# EAGLE board R3-URC18-V1 (1) (EAGLE 8.6.0)
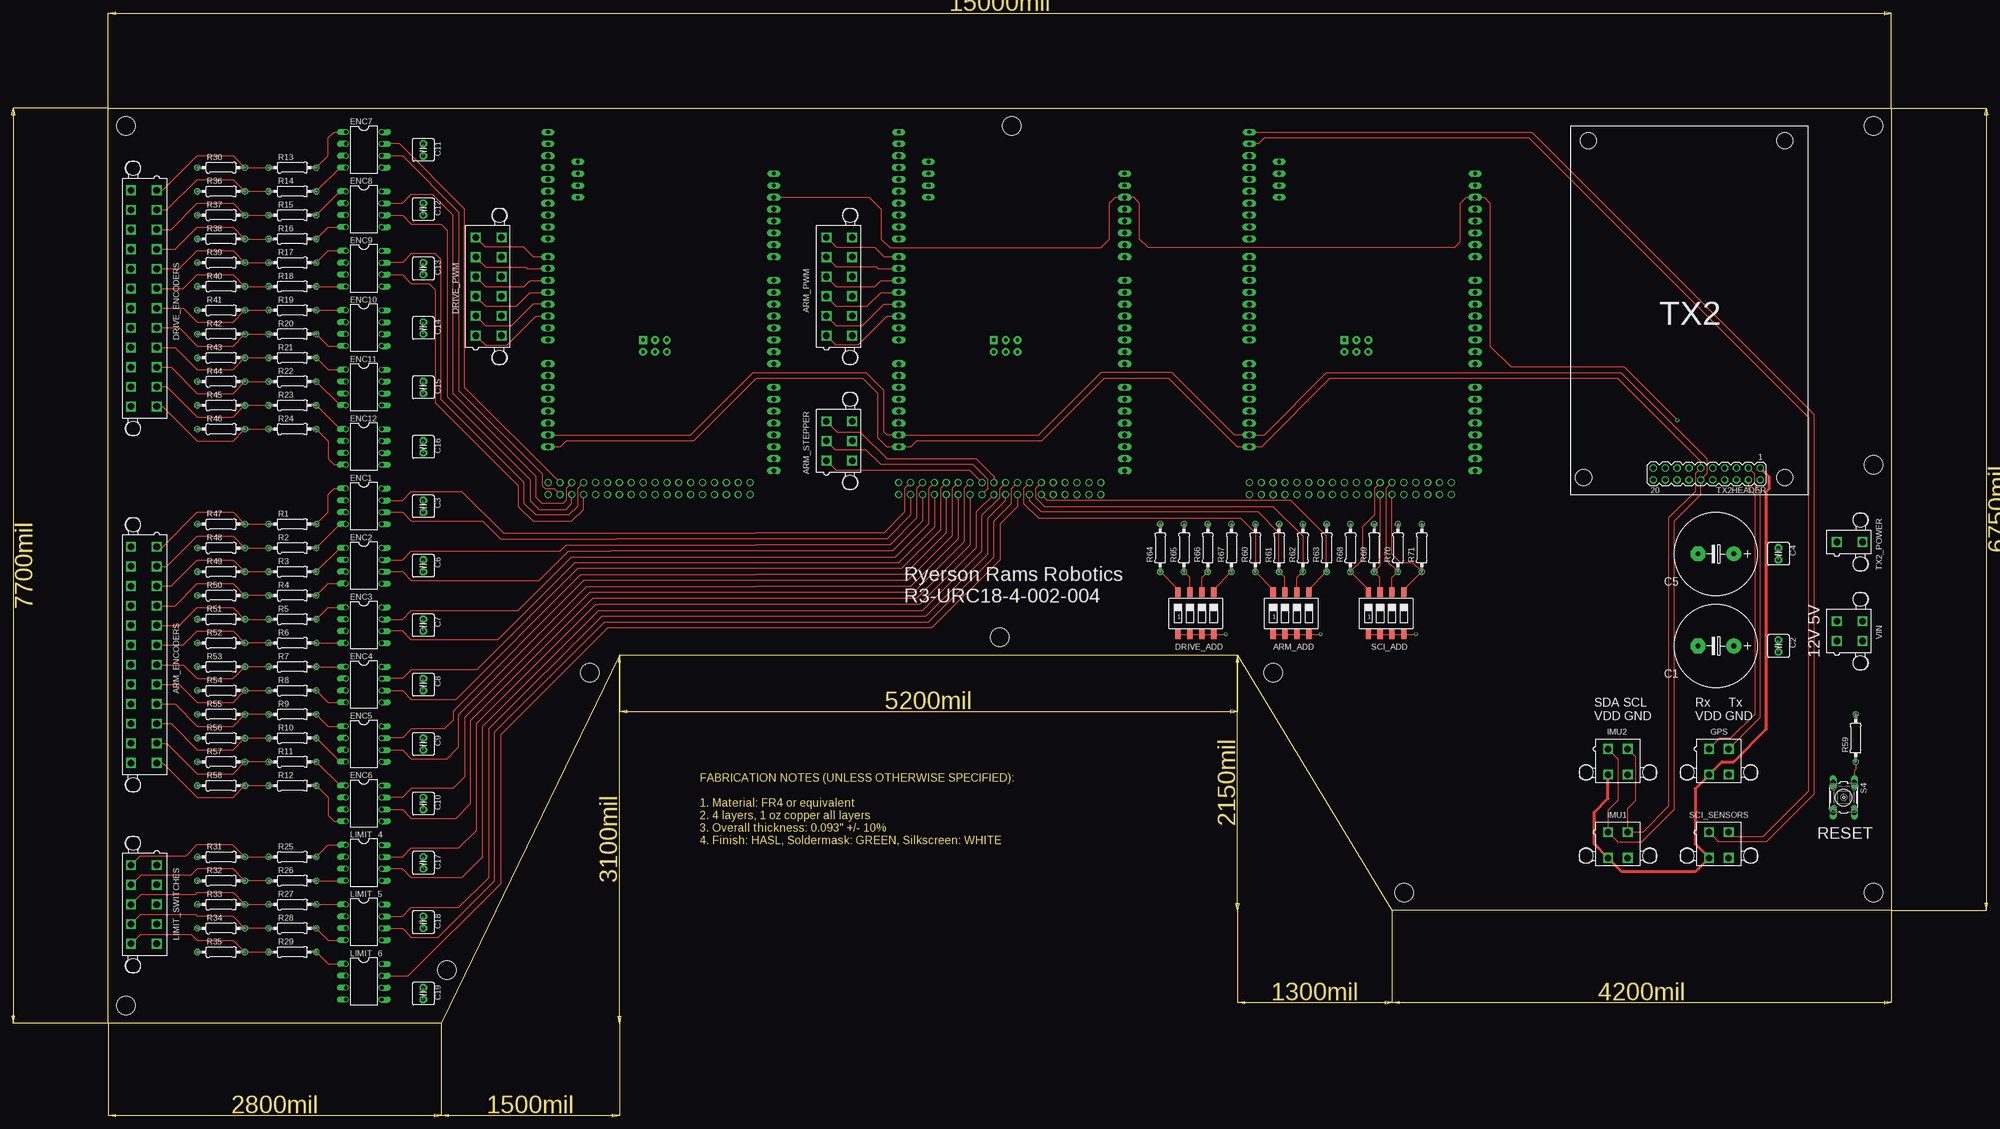
[diagram p0: board, top side]
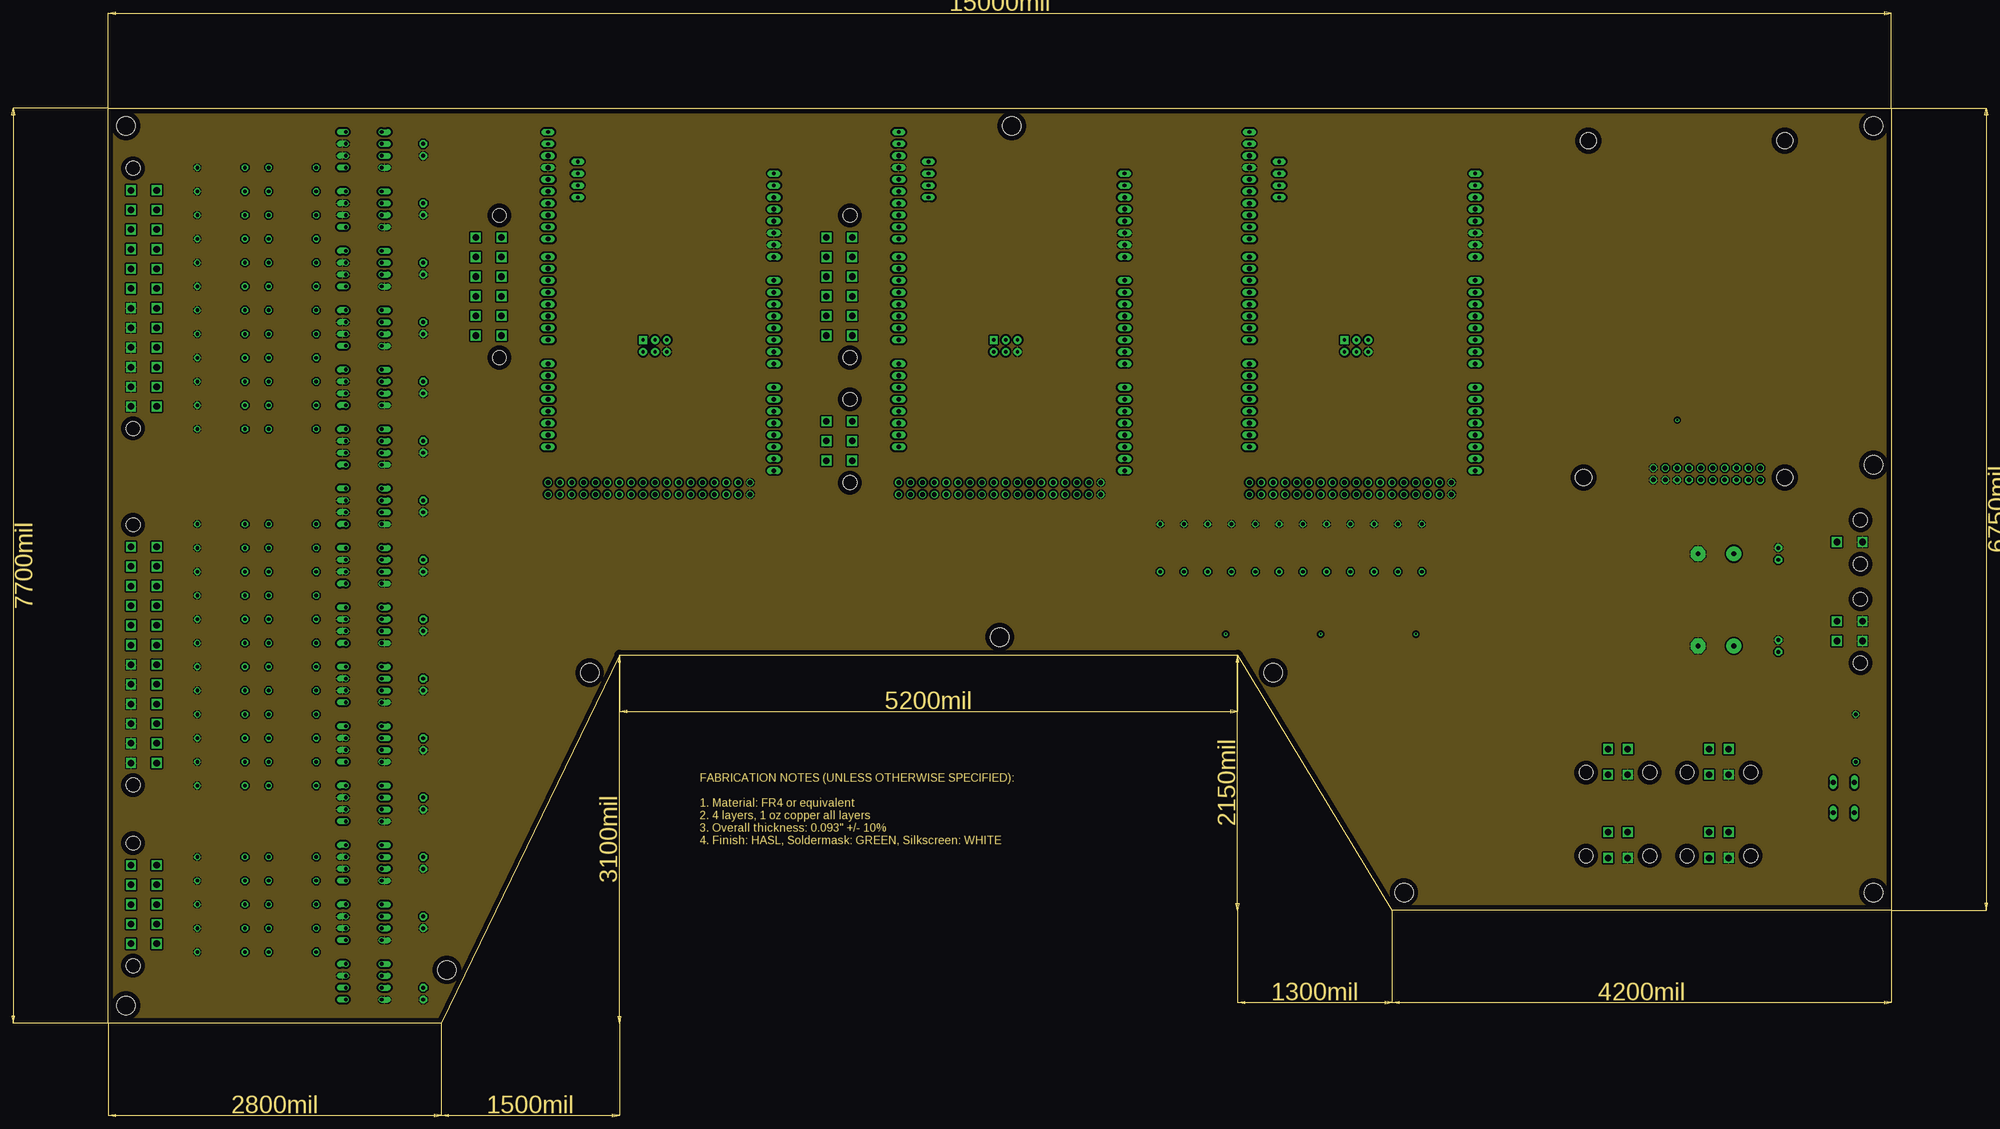
[diagram p1: board, inner layer $GND]
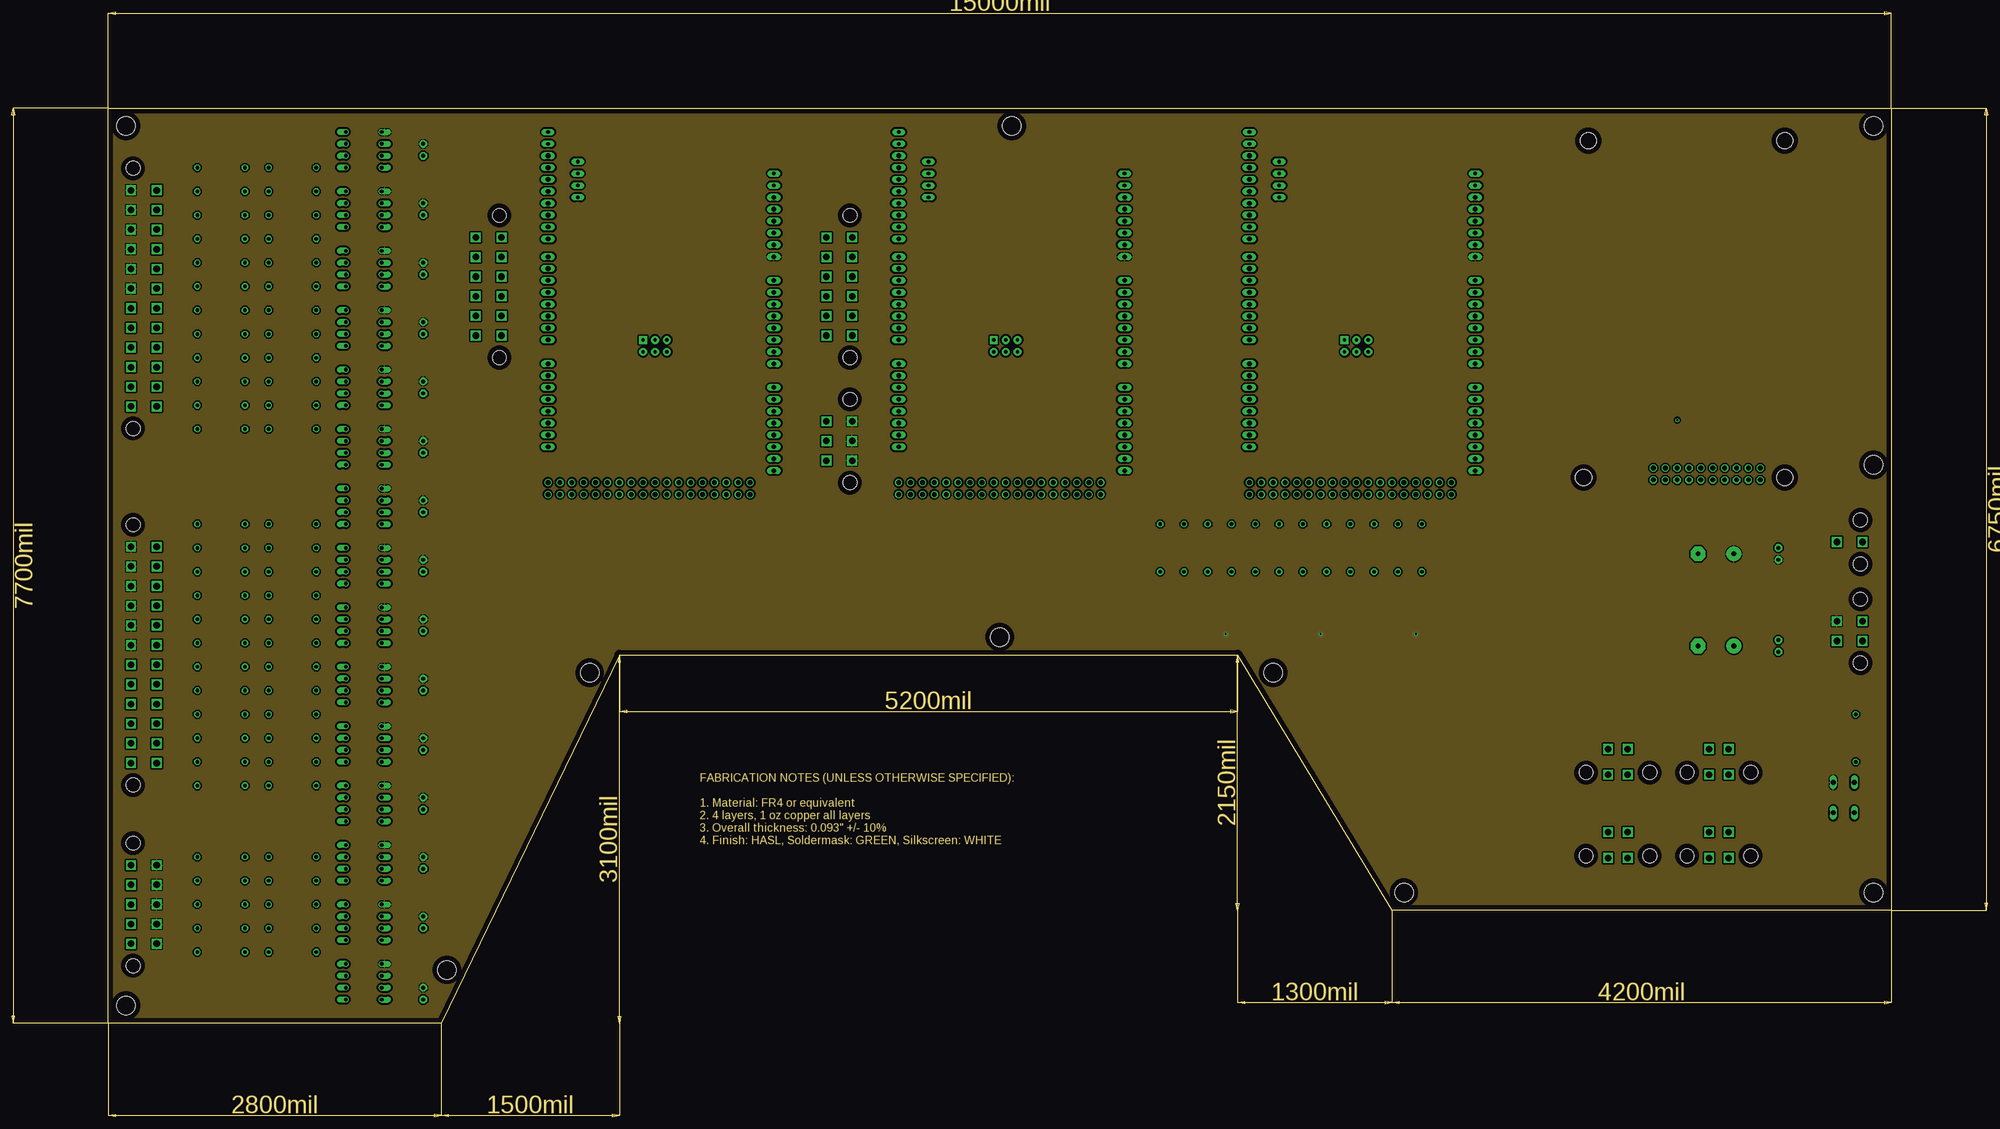
[diagram p2: board, inner layer $VCC]
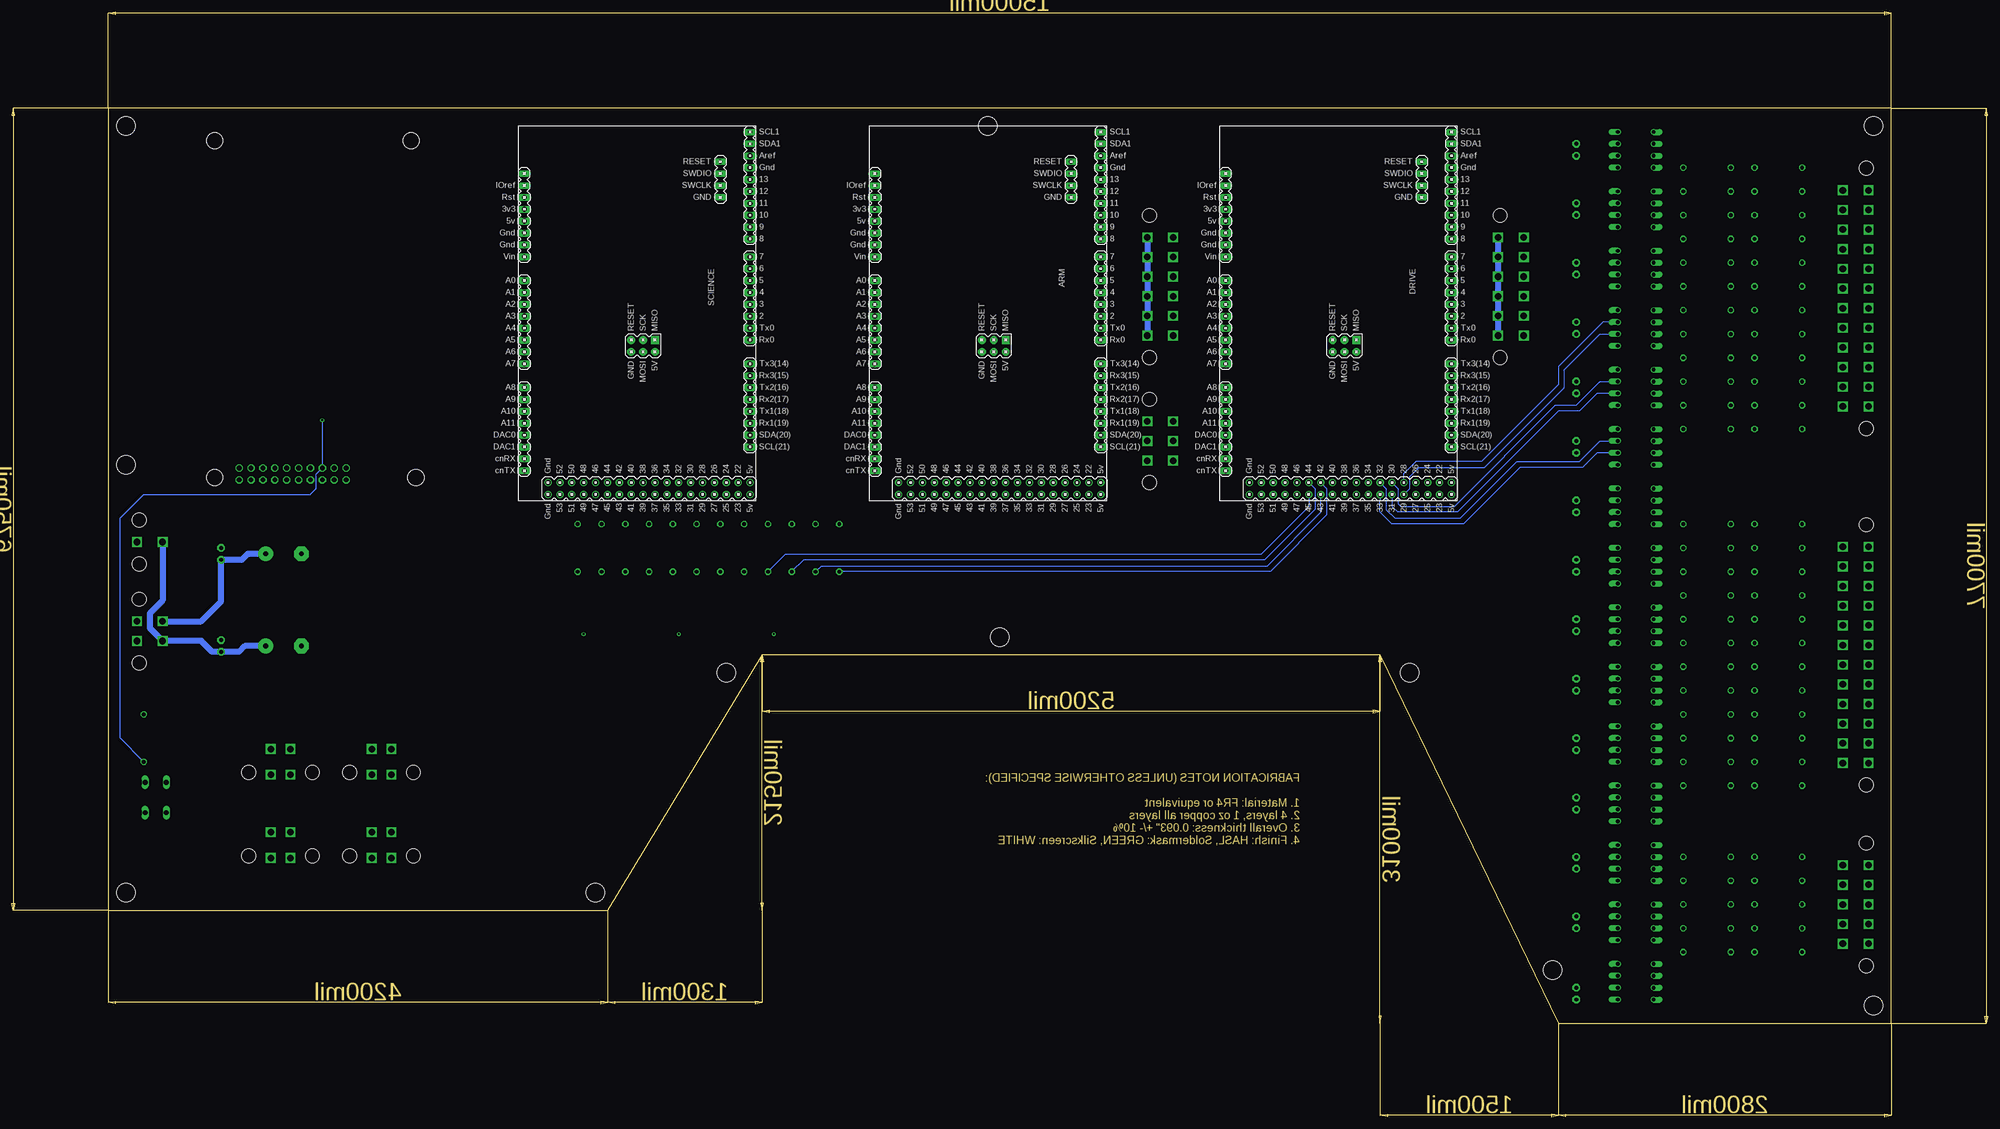
[diagram p3: board, bottom side, seen from below]

Size 381 x 195.58 mm. Coordinates in mm from the lower left corner, seen from the top.
Outline: 0,195.58 381,195.58 381,24.13 274.32,24.13 241.3,78.74 109.22,78.74 71.12,0 0,0 0,195.58
Copper layers (1+2*15+16): Top 0.035mm / dielectric 0.35mm / $GND 0.035mm / dielectric 1.6mm / $VCC 0.035mm / dielectric 0.35mm / Bottom 0.035mm
Design rules "default *": minimum track width 8mil, minimum drill 0.35mm, track to track 8mil, track to pad 8mil, pad to pad 8mil, via to via 8mil, smd to smd 8mil, copper to edge 40mil, drill to drill 8mil, minimum pad ring 10mil, minimum via ring 8mil, stop-mask expansion 4mil, vias tented up to drill 0mil, thermal gap 10mil
Holes 3.5 mm at 316.26,188.64 358.26,188.64 358.26,116.64 315.26,116.64
Holes 4 mm at 248.92,74.93 190.5,82.55 102.87,74.93 72.39,11.43 3.81,191.77 193.04,191.77 377.19,191.77 377.19,27.94 276.86,27.94 377.19,119.38 3.81,3.81

## Footprints (pad centres in the part's own frame; a part is rotated, then mirrored left to right if it is on the bottom)
DUE(BOTTOMONLY) = drill 1 long: 2 -16.51,30.48; 3 -19.05,30.48; 3V3 -39.37,-17.78; 4 -21.59,30.48; 5 -24.13,30.48; 5V -36.83,-17.78; 6 -26.67,30.48; 7 -29.21,30.48; 8 -33.02,30.48; 9 -35.56,30.48; 10 -38.1,30.48; 11 -40.64,30.48; 12 -43.18,30.48; 13 -45.72,30.48; A0 -24.13,-17.78; A1 -21.59,-17.78; A2 -19.05,-17.78; A3 -16.51,-17.78; A4 -13.97,-17.78; A5 -11.43,-17.78; A6 -8.89,-17.78; A7 -6.35,-17.78; A8 -1.27,-17.78; A9 1.27,-17.78; A10 3.81,-17.78; A11 6.35,-17.78; AREF -50.8,30.48; AREF1 -50.8,30.48; CANRX 13.97,-17.78; CANTX 16.51,-17.78; DAC0 8.89,-17.78; DAC1 11.43,-17.78; GND1 -48.26,30.48; GND_1 -34.29,-17.78; GND_2 -31.75,-17.78; RESET -41.91,-17.78; RX0 -11.43,30.48; RX1 6.35,30.48; RX2 1.27,30.48; RX3 -3.81,30.48; SCL 11.43,30.48; SDA 8.89,30.48; TX0 -13.97,30.48; TX1 3.81,30.48; TX2 -1.27,30.48; TX3 -6.35,30.48; VIN -29.21,-17.78 | drill 1: 5V_A 19.05,30.48; 5V_B 21.59,30.48; 22 19.05,27.94; 23 21.59,27.94; 24 19.05,25.4; 25 21.59,25.4; 26 19.05,22.86; 27 21.59,22.86; 28 19.05,20.32; 29 21.59,20.32; 30 19.05,17.78; 31 21.59,17.78; 32 19.05,15.24; 33 21.59,15.24; 34 19.05,12.7; 35 21.59,12.7; 36 19.05,10.16; 37 21.59,10.16; 38 19.05,7.62; 39 21.59,7.62; 40 19.05,5.08; 41 21.59,5.08; 42 19.05,2.54; 43 21.59,2.54; 44 19.05,0; 45 21.59,0; 46 19.05,-2.54; 47 21.59,-2.54; 48 19.05,-5.08; 49 21.59,-5.08; 50 19.05,-7.62; 51 21.59,-7.62; 52 19.05,-10.16; 53 21.59,-10.16; GND_A 19.05,-12.7; GND_B 21.59,-12.7 | drill 0.7 pad 1.676: 5V_ICSP -8.89,5.08; GND_ICSP -8.89,10.16; MOSI_ICSP -8.89,7.62; RESET_ICSP -11.43,5.08; SCK_ICSP -11.43,7.62 | drill 0.8 pad 1.422 long: GND_DEBUG -41.91,24.13; IOREF -44.45,-17.78; NC -46.99,-17.78; RESET_DEBUG -49.53,24.13; SCL1 -55.88,30.48; SDA1 -53.34,30.48; SWCLK_DEBUG -44.45,24.13; SWDIO_DEBUG -46.99,24.13 | drill 0.7 pad 1.676 square: MISO_ICSP -11.43,10.16
SMS-004 = smd 1.092 x 2.007: 1 -3.81,-4.496; 2 -1.27,-4.496; 3 1.27,-4.496; 4 3.81,-4.496; 5 3.81,4.496; 6 1.27,4.496; 7 -1.27,4.496; 8 -3.81,4.496
5566-24 = drill 1.4 square: 1 23.1,-2.75; 2 18.9,-2.75; 3 14.7,-2.75; 4 10.5,-2.75; 5 6.3,-2.75; 6 2.1,-2.75; 7 -2.1,-2.75; 8 -6.3,-2.75; 9 -10.5,-2.75; 10 -14.7,-2.75; 11 -18.9,-2.75; 12 -23.1,-2.75; 13 23.1,2.75; 14 18.9,2.75; 15 14.7,2.75; 16 10.5,2.75; 17 6.3,2.75; 18 2.1,2.75; 19 -2.1,2.75; 20 -6.3,2.75; 21 -10.5,2.75; 22 -14.7,2.75; 23 -18.9,2.75; 24 -23.1,2.75 | hole 3: 27.8,2.29; -27.8,2.29
5566-12 = drill 1.4 square: 1 10.5,-2.75; 2 6.3,-2.75; 3 2.1,-2.75; 4 -2.1,-2.75; 5 -6.3,-2.75; 6 -10.5,-2.75; 7 10.5,2.75; 8 6.3,2.75; 9 2.1,2.75; 10 -2.1,2.75; 11 -6.3,2.75; 12 -10.5,2.75 | hole 3: 15.2,2.29; -15.2,2.29
5566-6 = drill 1.4 square: 1 4.2,-2.75; 2 0,-2.75; 3 -4.2,-2.75; 4 4.2,2.75; 5 0,2.75; 6 -4.2,2.75 | hole 3: 8.9,2.29; -8.9,2.29
E7,5-18 = drill 1.016 pad 3.15: + -3.81,0 | drill 1.016 pad 3.15 octagon: - 3.81,0
C2.5-5 = drill 0.813 pad 1.6 octagon: 1 -1.27,0; 2 1.27,0
DIL08 = drill 0.813 offset: 1 -3.81,-3.81; 2 -1.27,-3.81; 3 1.27,-3.81; 4 3.81,-3.81; 5 3.81,3.81; 6 1.27,3.81; 7 -1.27,3.81; 8 -3.81,3.81
5566-4 = drill 1.4 square: 1 2.1,-2.75; 2 -2.1,-2.75; 3 2.1,2.75; 4 -2.1,2.75 | hole 3: 6.8,2.29; -6.8,2.29
5566-10 = drill 1.4 square: 1 8.4,-2.75; 2 4.2,-2.75; 3 0,-2.75; 4 -4.2,-2.75; 5 -8.4,-2.75; 6 8.4,2.75; 7 4.2,2.75; 8 0,2.75; 9 -4.2,2.75; 10 -8.4,2.75 | hole 3: 13.1,2.29; -13.1,2.29
0207/10 = drill 0.813 octagon: 1 -5.08,0; 2 5.08,0
B3F-10XX = drill 1.016 long: 1 -3.251,2.261; 2 3.251,2.261; 3 -3.251,-2.261; 4 3.251,-2.261
5566-2 = drill 1.4 square: 1 0,-2.75; 2 0,2.75 | hole 3: 4.7,2.29; -4.7,2.29
MA10-2 = drill 1.016 octagon: 1 -11.43,-1.27; 2 -11.43,1.27; 3 -8.89,-1.27; 4 -8.89,1.27; 5 -6.35,-1.27; 6 -6.35,1.27; 7 -3.81,-1.27; 8 -3.81,1.27; 9 -1.27,-1.27; 10 -1.27,1.27; 11 1.27,-1.27; 12 1.27,1.27; 13 3.81,-1.27; 14 3.81,1.27; 15 6.35,-1.27; 16 6.35,1.27; 17 8.89,-1.27; 18 8.89,1.27; 19 11.43,-1.27; 20 11.43,1.27

## Placement (x,y rotation side)
ARM  [DUE(BOTTOMONLY)]  199.39,134.62 270 bottom
ARM_ADD  SWS004  [SMS-004]  252.73,87.63 0 top
ARM_ENCODERS  MOLEX  [5566-24]  7.62,78.74 90 top
ARM_PWM  MOLEX  [5566-12]  156.21,157.48 270 top
ARM_STEPPER  5566-6  [5566-6]  156.21,124.46 270 top
C1  220uF  [E7,5-18]  343.54,80.64 180 top
C2  100nF  [C2.5-5]  356.87,80.64 270 top
C3  100nF  [C2.5-5]  67.31,110.49 270 top
C4  100nF  [C2.5-5]  356.87,100.33 270 top
C5  220uF  [E7,5-18]  343.54,100.33 180 top
C6  100nF  [C2.5-5]  67.31,97.79 270 top
C7  100nF  [C2.5-5]  67.31,85.09 270 top
C8  100nF  [C2.5-5]  67.31,72.39 270 top
C9  100nF  [C2.5-5]  67.31,59.69 270 top
C10  100nF  [C2.5-5]  67.31,46.99 270 top
C11  100nF  [C2.5-5]  67.31,186.69 270 top
C12  100nF  [C2.5-5]  67.31,173.99 270 top
C13  100nF  [C2.5-5]  67.31,161.29 270 top
C14  100nF  [C2.5-5]  67.31,148.59 270 top
C15  100nF  [C2.5-5]  67.31,135.89 270 top
C16  100nF  [C2.5-5]  67.31,123.19 270 top
C17  100nF  [C2.5-5]  67.31,34.29 270 top
C18  100nF  [C2.5-5]  67.31,21.59 270 top
C19  100nF  [C2.5-5]  67.31,6.35 270 top
DRIVE  [DUE(BOTTOMONLY)]  124.46,134.62 270 bottom
DRIVE_ADD  SWS004  [SMS-004]  232.41,87.63 0 top
DRIVE_ENCODERS  MOLEX  [5566-24]  7.62,154.94 90 top
DRIVE_PWM  MOLEX  [5566-12]  81.28,157.48 270 top
ENC1  HCPL2530  [DIL08]  54.61,110.49 270 top
ENC2  HCPL2530  [DIL08]  54.61,97.79 270 top
ENC3  HCPL2530  [DIL08]  54.61,85.09 270 top
ENC4  HCPL2530  [DIL08]  54.61,72.39 270 top
ENC5  HCPL2530  [DIL08]  54.61,59.69 270 top
ENC6  HCPL2530  [DIL08]  54.61,46.99 270 top
ENC7  HCPL2530  [DIL08]  54.61,186.69 270 top
ENC8  HCPL2530  [DIL08]  54.61,173.99 270 top
ENC9  HCPL2530  [DIL08]  54.61,161.29 270 top
ENC10  HCPL2530  [DIL08]  54.61,148.59 270 top
ENC11  HCPL2530  [DIL08]  54.61,135.89 270 top
ENC12  HCPL2530  [DIL08]  54.61,123.19 270 top
GPS  MOLEX  [5566-4]  344.17,55.88 180 top
IMU1  MOLEX  [5566-4]  322.58,38.1 180 top
IMU2  MOLEX  [5566-4]  322.58,55.88 180 top
LIMIT_4  HCPL2530  [DIL08]  54.61,34.29 270 top
LIMIT_5  HCPL2530  [DIL08]  54.61,21.59 270 top
LIMIT_6  HCPL2530  [DIL08]  54.61,8.89 270 top
LIMIT_SWITCHES  MOLEX  [5566-10]  7.62,25.4 90 top
R1  240  [0207/10]  39.37,106.68 0 top
R2  240  [0207/10]  39.37,101.6 0 top
R3  240  [0207/10]  39.37,96.52 0 top
R4  240  [0207/10]  39.37,91.44 0 top
R5  240  [0207/10]  39.37,86.36 0 top
R6  240  [0207/10]  39.37,81.28 0 top
R7  240  [0207/10]  39.37,76.2 0 top
R8  240  [0207/10]  39.37,71.12 0 top
R9  240  [0207/10]  39.37,66.04 0 top
R10  240  [0207/10]  39.37,60.96 0 top
R11  240  [0207/10]  39.37,55.88 0 top
R12  240  [0207/10]  39.37,50.8 0 top
R13  240  [0207/10]  39.37,182.88 0 top
R14  240  [0207/10]  39.37,177.8 0 top
R15  240  [0207/10]  39.37,172.72 0 top
R16  240  [0207/10]  39.37,167.64 0 top
R17  240  [0207/10]  39.37,162.56 0 top
R18  240  [0207/10]  39.37,157.48 0 top
R19  240  [0207/10]  39.37,152.4 0 top
R20  240  [0207/10]  39.37,147.32 0 top
R21  240  [0207/10]  39.37,142.24 0 top
R22  240  [0207/10]  39.37,137.16 0 top
R23  240  [0207/10]  39.37,132.08 0 top
R24  240  [0207/10]  39.37,127 0 top
R25  240  [0207/10]  39.37,35.56 0 top
R26  240  [0207/10]  39.37,30.48 0 top
R27  240  [0207/10]  39.37,25.4 0 top
R28  240  [0207/10]  39.37,20.32 0 top
R29  240  [0207/10]  39.37,15.24 0 top
R30  10k  [0207/10]  24.13,182.88 0 top
R31  10k  [0207/10]  24.13,35.56 0 top
R32  10k  [0207/10]  24.13,30.48 0 top
R33  10k  [0207/10]  24.13,25.4 0 top
R34  10k  [0207/10]  24.13,20.32 0 top
R35  10k  [0207/10]  24.13,15.24 0 top
R36  10k  [0207/10]  24.13,177.8 0 top
R37  10k  [0207/10]  24.13,172.72 0 top
R38  10k  [0207/10]  24.13,167.64 0 top
R39  10k  [0207/10]  24.13,162.56 0 top
R40  10k  [0207/10]  24.13,157.48 0 top
R41  10k  [0207/10]  24.13,152.4 0 top
R42  10k  [0207/10]  24.13,147.32 0 top
R43  10k  [0207/10]  24.13,142.24 0 top
R44  10k  [0207/10]  24.13,137.16 0 top
R45  10k  [0207/10]  24.13,132.08 0 top
R46  10k  [0207/10]  24.13,127 0 top
R47  10k  [0207/10]  24.13,106.68 0 top
R48  10k  [0207/10]  24.13,101.6 0 top
R49  10k  [0207/10]  24.13,96.52 0 top
R50  10k  [0207/10]  24.13,91.44 0 top
R51  10k  [0207/10]  24.13,86.36 0 top
R52  10k  [0207/10]  24.13,81.28 0 top
R53  10k  [0207/10]  24.13,76.2 0 top
R54  10k  [0207/10]  24.13,71.12 0 top
R55  10k  [0207/10]  24.13,66.04 0 top
R56  10k  [0207/10]  24.13,60.96 0 top
R57  10k  [0207/10]  24.13,55.88 0 top
R58  10k  [0207/10]  24.13,50.8 0 top
R59  10k  [0207/10]  373.38,60.96 90 top
R60  10k  [0207/10]  245.11,101.6 90 top
R61  10k  [0207/10]  250.19,101.6 90 top
R62  10k  [0207/10]  255.27,101.6 90 top
R63  10k  [0207/10]  260.35,101.6 90 top
R64  10k  [0207/10]  224.79,101.6 90 top
R65  10k  [0207/10]  229.87,101.6 90 top
R66  10k  [0207/10]  234.95,101.6 90 top
R67  10k  [0207/10]  240.03,101.6 90 top
R68  10k  [0207/10]  265.43,101.6 90 top
R69  10k  [0207/10]  270.51,101.6 90 top
R70  10k  [0207/10]  275.59,101.6 90 top
R71  10k  [0207/10]  280.67,101.6 90 top
S4  [B3F-10XX]  370.84,48.26 270 top
SCI_ADD  SWS004  [SMS-004]  273.05,87.63 0 top
SCI_SENSORS  MOLEX  [5566-4]  344.17,38.1 180 top
SCIENCE  [DUE(BOTTOMONLY)]  274.32,134.62 270 bottom
TX2_POWER  5566-2  [5566-2]  372.11,102.87 270 top
TX2HEADER  [MA10-2]  341.59,117.41 180 top
VIN  MOLEX  [5566-4]  372.11,83.82 270 top

## Library data of the parts
ARM DRIVE SCIENCE = DUElib130425
ARM_ADD DRIVE_ADD SCI_ADD = smd-special
ARM_ENCODERS ARM_PWM DRIVE_ENCODERS DRIVE_PWM GPS IMU1 IMU2 LIMIT_SWITCHES SCI_SENSORS VIN = con-molex; MF: MOLEX; OC_FARNELL: unknown; OC_NEWARK: unknown
ARM_STEPPER = con-molex; MF: MOLEX; MPN: 95566-61002; OC_FARNELL: unknown; OC_NEWARK: 22K8620
C1 C5 = resistor
C2-C4 C6-C19 = capacitor-wima
ENC1-ENC12 LIMIT_4-LIMIT_6 = optocoupler; MF: AGILENT TECHNOLOGIES; MPN: HCPL-2530-000E; OC_FARNELL: 9994793; OC_NEWARK: 31K6974
R1-R71 = rcl; SPICEPREFIX: R
S4 = switch-omron; MPN: B3F-1000; OC_FARNELL: 176432; OC_NEWARK: 36M3542
TX2_POWER = con-molex; MF: MOLEX; OC_FARNELL: 1822072; OC_NEWARK: unknown
TX2HEADER = con-lstb; OC_FARNELL: unknown; OC_NEWARK: unknown

## Nets
ARM_ADD_1: ARM.42 ARM_ADD.8 R60.1
ARM_ADD_2: ARM.43 ARM_ADD.7 R61.1
ARM_ADD_3: ARM.44 ARM_ADD.6 R62.1
ARM_ADD_4: ARM.45 ARM_ADD.5 R63.1
ARM_ENC1_A: ARM_ENCODERS.1 R1.1 R47.2
ARM_ENC1_B: ARM_ENCODERS.2 R2.1 R48.2
ARM_ENC2_A: ARM_ENCODERS.3 R3.1 R49.2
ARM_ENC2_B: ARM_ENCODERS.4 R4.1 R50.2
ARM_ENC3_A: ARM_ENCODERS.5 R5.1 R51.2
ARM_ENC3_B: ARM_ENCODERS.6 R6.1 R52.2
ARM_ENC4_A: ARM_ENCODERS.7 R7.1 R53.2
ARM_ENC4_B: ARM_ENCODERS.8 R8.1 R54.2
ARM_ENC5_A: ARM_ENCODERS.9 R9.1 R55.2
ARM_ENC5_B: ARM_ENCODERS.10 R10.1 R56.2
ARM_ENC6_A: ARM_ENCODERS.11 R11.1 R57.2
ARM_ENC6_B: ARM_ENCODERS.12 R12.1 R58.2
BATTERY_IN: C1.+ C2.2 TX2_POWER.1 VIN.1
DRIVE_ADD_1: DRIVE.42 DRIVE_ADD.8 R64.1
DRIVE_ADD_2: DRIVE.43 DRIVE_ADD.7 R65.1
DRIVE_ADD_3: DRIVE.44 DRIVE_ADD.6 R66.1
DRIVE_ADD_4: DRIVE.45 DRIVE_ADD.5 R67.1
DRIVE_ENC1_A: DRIVE_ENCODERS.1 R13.1 R30.2
DRIVE_ENC1_B: DRIVE_ENCODERS.2 R14.1 R36.2
DRIVE_ENC2_A: DRIVE_ENCODERS.3 R15.1 R37.2
DRIVE_ENC2_B: DRIVE_ENCODERS.4 R16.1 R38.2
DRIVE_ENC3_A: DRIVE_ENCODERS.5 R17.1 R39.2
DRIVE_ENC3_B: DRIVE_ENCODERS.6 R18.1 R40.2
DRIVE_ENC4_A: DRIVE_ENCODERS.7 R19.1 R41.2
DRIVE_ENC4_B: DRIVE_ENCODERS.8 R20.1 R42.2
DRIVE_ENC5_A: DRIVE_ENCODERS.9 R21.1 R43.2
DRIVE_ENC5_B: DRIVE_ENCODERS.10 R22.1 R44.2
DRIVE_ENC6_A: DRIVE_ENCODERS.11 R23.1 R45.2
DRIVE_ENC6_B: DRIVE_ENCODERS.12 R24.1 R46.2
ENC1_A: DRIVE.22 ENC7.7
ENC1_ARM_A: ARM.22 ENC1.7
ENC1_ARM_B: ARM.23 ENC1.6
ENC1_B: DRIVE.23 ENC7.6
ENC2_A: DRIVE.24 ENC8.7
ENC2_ARM_A: ARM.24 ENC2.7
ENC2_ARM_B: ARM.25 ENC2.6
ENC2_B: DRIVE.25 ENC8.6
ENC3_A: DRIVE.26 ENC9.7
ENC3_ARM_A: ARM.26 ENC3.7
ENC3_ARM_B: ARM.27 ENC3.6
ENC3_B: DRIVE.27 ENC9.6
ENC4_A: DRIVE.28 ENC10.7
ENC4_ARM_A: ARM.28 ENC4.7
ENC4_ARM_B: ARM.29 ENC4.6
ENC4_B: DRIVE.29 ENC10.6
ENC5_A: DRIVE.30 ENC11.7
ENC5_ARM_A: ARM.30 ENC5.7
ENC5_ARM_B: ARM.31 ENC5.6
ENC5_B: DRIVE.31 ENC11.6
ENC6_A: DRIVE.32 ENC12.7
ENC6_ARM_A: ARM.32 ENC6.7
ENC6_ARM_B: ARM.33 ENC6.6
ENC6_B: DRIVE.33 ENC12.6
GND: ARM.5V_ICSP ARM.GND1 ARM.GND_1 ARM.GND_2 ARM.GND_A ARM.GND_B ARM_ENCODERS.19 ARM_ENCODERS.20 ARM_ENCODERS.21 ARM_ENCODERS.22 ARM_ENCODERS.23 ARM_ENCODERS.24 C1.- C2.1 C3.2 C4.1 C5.- C6.2 C7.2 C8.2 C9.2 C10.2 C11.2 C12.2 C13.2 C14.2 C15.2 C16.2 C17.2 C18.2 C19.2 DRIVE.5V_ICSP DRIVE.GND1 DRIVE.GND_1 DRIVE.GND_2 DRIVE.GND_A DRIVE.GND_B DRIVE_ENCODERS.19 DRIVE_ENCODERS.20 DRIVE_ENCODERS.21 DRIVE_ENCODERS.22 DRIVE_ENCODERS.23 DRIVE_ENCODERS.24 ENC1.2 ENC1.3 ENC1.5 ENC2.2 ENC2.3 ENC2.5 ENC3.2 ENC3.3 ENC3.5 ENC4.2 ENC4.3 ENC4.5 ENC5.2 ENC5.3 ENC5.5 ENC6.2 ENC6.3 ENC6.5 ENC7.2 ENC7.3 ENC7.5 ENC8.2 ENC8.3 ENC8.5 ENC9.2 ENC9.3 ENC9.5 ENC10.2 ENC10.3 ENC10.5 ENC11.2 ENC11.3 ENC11.5 ENC12.2 ENC12.3 ENC12.5 GPS.4 IMU1.4 IMU2.4 LIMIT_4.2 LIMIT_4.3 LIMIT_4.5 LIMIT_5.2 LIMIT_5.3 LIMIT_5.5 LIMIT_6.2 LIMIT_6.5 R30.1 R31.1 R32.1 R33.1 R34.1 R35.1 R36.1 R37.1 R38.1 R39.1 R40.1 R41.1 R42.1 R43.1 R44.1 R45.1 R46.1 R47.1 R48.1 R49.1 R50.1 R51.1 R52.1 R53.1 R54.1 R55.1 R56.1 R57.1 R58.1 R59.2 R60.2 R61.2 R62.2 R63.2 R64.2 R65.2 R66.2 R67.2 R68.2 R69.2 R70.2 R71.2 SCI_SENSORS.4 SCIENCE.5V_ICSP SCIENCE.GND1 SCIENCE.GND_1 SCIENCE.GND_2 SCIENCE.GND_A SCIENCE.GND_B TX2_POWER.2 TX2HEADER.16 TX2HEADER.18 TX2HEADER.19 TX2HEADER.20 VIN.3 VIN.4
LIM_1: LIMIT_SWITCHES.6 R25.1 R31.2
LIM_2: LIMIT_SWITCHES.7 R26.1 R32.2
LIM_3: LIMIT_SWITCHES.8 R27.1 R33.2
LIM_4: LIMIT_SWITCHES.9 R28.1 R34.2
LIM_5: LIMIT_SWITCHES.10 R29.1 R35.2
LIMIT_1: ARM.37 LIMIT_4.7
LIMIT_2: ARM.38 LIMIT_4.6
LIMIT_3: ARM.39 LIMIT_5.7
LIMIT_4: ARM.40 LIMIT_5.6
LIMIT_5: ARM.41 LIMIT_6.7
N$1: ARM_PWM.7 ARM_PWM.8 ARM_PWM.9 ARM_PWM.10 ARM_PWM.11 ARM_PWM.12
N$2: ENC1.1 R1.2
N$3: ENC1.4 R2.2
N$4: ENC2.1 R3.2
N$5: ENC2.4 R4.2
N$6: ENC3.1 R5.2
N$7: ENC3.4 R6.2
N$8: DRIVE_PWM.7 DRIVE_PWM.8 DRIVE_PWM.9 DRIVE_PWM.10 DRIVE_PWM.11 DRIVE_PWM.12
N$9: ENC4.1 R7.2
N$10: ENC4.4 R8.2
N$11: ENC5.1 R9.2
N$12: ENC5.4 R10.2
N$13: ENC6.1 R11.2
N$14: ENC6.4 R12.2
N$15: LIMIT_4.1 R25.2
N$16: SCI_SENSORS.2 SCIENCE.SDA1
N$17: LIMIT_4.4 R26.2
N$18: SCI_SENSORS.1 SCIENCE.SCL1
N$19: LIMIT_5.1 R27.2
N$21: LIMIT_5.4 R28.2
N$23: LIMIT_6.1 R29.2
N$27: ENC7.1 R13.2
N$28: ENC7.4 R14.2
N$29: ENC8.1 R15.2
N$30: ENC8.4 R16.2
N$31: ENC9.1 R17.2
N$32: ENC9.4 R18.2
N$33: ENC10.1 R19.2
N$34: ENC10.4 R20.2
N$35: ENC11.1 R21.2
N$36: ENC11.4 R22.2
N$37: ENC12.1 R23.2
N$38: ENC12.4 R24.2
PWM_ARM_J1: ARM.2 ARM_PWM.1
PWM_ARM_J2: ARM.3 ARM_PWM.2
PWM_ARM_J3: ARM.4 ARM_PWM.3
PWM_ARM_J4: ARM.5 ARM_PWM.4
PWM_ARM_J5: ARM.6 ARM_PWM.5
PWM_ARM_J6: ARM.7 ARM_PWM.6
PWM_DRIVE_1: DRIVE.2 DRIVE_PWM.1
PWM_DRIVE_2: DRIVE.3 DRIVE_PWM.2
PWM_DRIVE_3: DRIVE.4 DRIVE_PWM.3
PWM_DRIVE_4: DRIVE.5 DRIVE_PWM.4
PWM_DRIVE_5: DRIVE.6 DRIVE_PWM.5
PWM_DRIVE_6: DRIVE.7 DRIVE_PWM.6
RESET: ARM.RESET DRIVE.RESET R59.1 S4.1 SCIENCE.RESET TX2HEADER.15
SCI_ADD_1: R68.1 SCI_ADD.8 SCIENCE.42
SCI_ADD_2: R69.1 SCI_ADD.7 SCIENCE.43
SCI_ADD_3: R70.1 SCI_ADD.6 SCIENCE.44
SCI_ADD_4: R71.1 SCI_ADD.5 SCIENCE.45
SCL: ARM.SCL DRIVE.SCL IMU1.2 IMU2.2 SCIENCE.SCL TX2HEADER.11
SDA: ARM.SDA DRIVE.SDA IMU1.1 IMU2.1 SCIENCE.SDA TX2HEADER.12
STEPPER_DIR: ARM.35 ARM_STEPPER.2
STEPPER_ENA: ARM.34 ARM_STEPPER.1
STEPPER_PUL: ARM.36 ARM_STEPPER.3
UART0_RX: GPS.1 TX2HEADER.4
UART0_TX: GPS.2 TX2HEADER.3
UART1_RX: TX2HEADER.6
UART1_TX: TX2HEADER.5
VCC: ARM.VIN ARM_ADD.1 ARM_ADD.2 ARM_ADD.3 ARM_ADD.4 ARM_ENCODERS.13 ARM_ENCODERS.14 ARM_ENCODERS.15 ARM_ENCODERS.16 ARM_ENCODERS.17 ARM_ENCODERS.18 ARM_STEPPER.4 ARM_STEPPER.5 ARM_STEPPER.6 C3.1 C4.2 C5.+ C6.1 C7.1 C8.1 C9.1 C10.1 C11.1 C12.1 C13.1 C14.1 C15.1 C16.1 C17.1 C18.1 C19.1 DRIVE.VIN DRIVE_ADD.1 DRIVE_ADD.2 DRIVE_ADD.3 DRIVE_ADD.4 DRIVE_ENCODERS.13 DRIVE_ENCODERS.14 DRIVE_ENCODERS.15 DRIVE_ENCODERS.16 DRIVE_ENCODERS.17 DRIVE_ENCODERS.18 ENC1.8 ENC2.8 ENC3.8 ENC4.8 ENC5.8 ENC6.8 ENC7.8 ENC8.8 ENC9.8 ENC10.8 ENC11.8 ENC12.8 LIMIT_4.8 LIMIT_5.8 LIMIT_6.8 LIMIT_SWITCHES.1 LIMIT_SWITCHES.2 LIMIT_SWITCHES.3 LIMIT_SWITCHES.4 LIMIT_SWITCHES.5 S4.3 SCI_ADD.1 SCI_ADD.2 SCI_ADD.3 SCI_ADD.4 SCIENCE.VIN VIN.2
VDD: GPS.3 IMU1.3 IMU2.3 SCI_SENSORS.3 TX2HEADER.1

## Tracks (layer width: path | path; a pad name or v marks a point on that pad's centre or on a via)
ARM_ADD_1
  Top 0.254: ARM_ADD.8 248.92,92.71 R60.1 245.11,104.78 241.94,107.95 239.4,107.95 238.76,107.95 198.75,107.95 195.58,111.12 195.58,114.3 ARM.42
ARM_ADD_2
  Top 0.254: ARM_ADD.7 251.46,95.25 R61.1 250.19,104.78 245.75,109.22 199.39,109.22 196.85,111.76 ARM.43
ARM_ADD_3
  Top 0.254: ARM_ADD.6 254,95.25 R62.1 255.27,104.14 248.92,110.49 200.03,110.49 198.12,112.39 198.12,114.3 ARM.44
ARM_ADD_4
  Top 0.254: ARM_ADD.5 256.54,92.71 R63.1 260.35,104.14 252.73,111.76 200.66,111.76 ARM.45
ARM_ENC1_A
  Top 0.254: R1.1 R47.2 26.67,109.22 19.05,109.22 11.67,101.84 ARM_ENCODERS.1
ARM_ENC1_B
  Top 0.254: R2.1 R48.2 26.67,104.14 19.05,104.14 12.55,97.64 ARM_ENCODERS.2
ARM_ENC2_A
  Top 0.254: R3.1 R49.2 26.67,99.06 19.05,99.06 13.43,93.44 ARM_ENCODERS.3
ARM_ENC2_B
  Top 0.254: R4.1 R50.2 26.67,93.98 19.05,93.98 14.31,89.24 ARM_ENCODERS.4
ARM_ENC3_A
  Top 0.254: R5.1 R51.2 26.67,88.9 19.05,88.9 15.19,85.04 ARM_ENCODERS.5
ARM_ENC3_B
  Top 0.254: ARM_ENCODERS.6 16.07,80.84 19.05,83.82 26.67,83.82 R52.2 R6.1
ARM_ENC4_A
  Top 0.254: ARM_ENCODERS.7 16.07,76.64 19.05,73.66 26.67,73.66 R53.2 R7.1
ARM_ENC4_B
  Top 0.254: ARM_ENCODERS.8 15.19,72.44 19.05,68.58 26.67,68.58 R54.2 R8.1
ARM_ENC5_A
  Top 0.254: ARM_ENCODERS.9 14.31,68.24 19.05,63.5 26.67,63.5 R55.2 R9.1
ARM_ENC5_B
  Top 0.254: ARM_ENCODERS.10 13.43,64.04 19.05,58.42 26.67,58.42 R56.2 R10.1
ARM_ENC6_A
  Top 0.254: ARM_ENCODERS.11 12.55,59.84 19.05,53.34 26.67,53.34 R57.2 R11.1
ARM_ENC6_B
  Top 0.254: ARM_ENCODERS.12 11.67,55.64 19.05,48.26 26.67,48.26 R58.2 R12.1
BATTERY_IN
  Bottom 1.27: TX2_POWER.1 369.36,90.38 372.11,87.63 372.11,84.47 VIN.1 361.12,81.72 358.77,79.38 C2.2 353.06,79.38 351.79,80.64 C1.+
DRIVE_ADD_1
  Top 0.254: DRIVE_ADD.8 228.6,92.71 R64.1
  Bottom 0.254: DRIVE.42 120.65,114.3 120.65,108.58 132.72,96.52 R64.1
DRIVE_ADD_2
  Top 0.254: DRIVE_ADD.7 231.14,95.25 R65.1
  Bottom 0.254: R65.1 228.6,97.79 133.35,97.79 121.92,109.22 DRIVE.43
DRIVE_ADD_3
  Top 0.254: DRIVE_ADD.6 233.68,95.25 R66.1
  Bottom 0.254: DRIVE.44 123.19,114.3 123.19,109.86 133.99,99.06 232.41,99.06 R66.1
DRIVE_ADD_4
  Top 0.254: DRIVE_ADD.5 236.22,92.71 R67.1
  Bottom 0.254: R67.1 236.22,100.33 134.62,100.33 124.46,110.49 DRIVE.45
DRIVE_ENC1_A
  Top 0.254: R13.1 R30.2 26.67,185.42 19.05,185.42 11.67,178.04 DRIVE_ENCODERS.1
DRIVE_ENC1_B
  Top 0.254: DRIVE_ENCODERS.2 12.55,173.84 19.05,180.34 26.67,180.34 R36.2 R14.1
DRIVE_ENC2_A
  Top 0.254: R15.1 R37.2 26.67,175.26 19.05,175.26 13.43,169.64 DRIVE_ENCODERS.3
DRIVE_ENC2_B
  Top 0.254: R16.1 R38.2 26.67,170.18 19.05,170.18 14.31,165.44 DRIVE_ENCODERS.4
DRIVE_ENC3_A
  Top 0.254: R17.1 R39.2 26.67,165.1 19.05,165.1 15.19,161.24 DRIVE_ENCODERS.5
DRIVE_ENC3_B
  Top 0.254: R18.1 R40.2 26.67,160.02 19.05,160.02 16.07,157.04 DRIVE_ENCODERS.6
DRIVE_ENC4_A
  Top 0.254: R19.1 R41.2 26.67,149.86 19.05,149.86 16.07,152.84 DRIVE_ENCODERS.7
DRIVE_ENC4_B
  Top 0.254: R20.1 R42.2 26.67,144.78 19.05,144.78 15.19,148.64 DRIVE_ENCODERS.8
DRIVE_ENC5_A
  Top 0.254: R21.1 R43.2 26.67,139.7 19.05,139.7 14.31,144.44 DRIVE_ENCODERS.9
DRIVE_ENC5_B
  Top 0.254: R22.1 R44.2 26.67,134.62 19.05,134.62 13.43,140.24 DRIVE_ENCODERS.10
DRIVE_ENC6_A
  Top 0.254: R23.1 R45.2 26.67,129.54 19.05,129.54 12.55,136.04 DRIVE_ENCODERS.11
DRIVE_ENC6_B
  Top 0.254: R24.1 R46.2 26.67,124.46 19.05,124.46 11.67,131.84 DRIVE_ENCODERS.12
ENC1_A
  Top 0.254: DRIVE.22 76.2,135.89 76.2,173.99 62.23,187.96 ENC7.7
ENC1_ARM_A
  Top 0.254: ARM.22 170.18,114.3 170.18,109.22 165.74,104.78 139.7,104.78 138.43,104.78 84.45,104.78 75.56,113.67 64.77,113.67 62.87,111.76 ENC1.7
ENC1_ARM_B
  Top 0.254: ARM.23 171.45,108.58 166.37,103.5 139.7,103.5 138.43,103.5 108.58,103.5 107.95,103.5 83.82,103.5 80.01,107.31 64.77,107.31 62.87,109.22 ENC1.6
ENC1_B
  Top 0.254: ENC7.6 62.87,185.42 74.93,173.35 74.93,135.25 92.71,117.47 92.71,114.94 93.34,114.3 95.25,114.3 DRIVE.23
ENC2_A
  Top 0.254: DRIVE.24 97.79,114.3 97.79,111.76 97.16,111.12 92.71,111.12 91.44,112.39 91.44,116.84 73.66,134.62 73.66,172.72 69.22,177.16 64.77,177.16 62.87,175.26 ENC8.7
ENC2_ARM_A
  Top 0.254: ARM.24 172.72,114.3 172.72,107.95 167,102.23 139.7,102.23 138.43,102.23 107.95,102.23 107.31,102.23 97.79,102.23 96.52,100.97 64.77,100.97 62.87,99.06 ENC2.7
ENC2_ARM_B
  Top 0.254: ARM.25 173.99,107.31 167.64,100.97 107.31,100.97 106.68,100.97 98.42,100.97 92.08,94.61 64.77,94.61 62.87,96.52 ENC2.6
ENC2_B
  Top 0.254: ENC8.6 62.87,172.72 64.77,170.81 71.12,170.81 72.39,169.54 72.39,133.99 90.17,116.2 90.17,111.76 92.08,109.86 97.79,109.86 99.06,111.12 DRIVE.25
ENC3_A
  Top 0.254: DRIVE.26 100.33,114.3 100.33,110.49 98.42,108.58 91.44,108.58 88.9,111.12 88.9,115.57 71.12,133.35 71.12,163.19 69.85,164.47 64.77,164.47 62.87,162.56 ENC9.7
ENC3_ARM_A
  Top 0.254: ARM.26 175.26,114.3 175.26,106.68 168.28,99.69 99.06,99.69 87.63,88.27 64.77,88.27 62.87,86.36 ENC3.7
ENC3_ARM_B
  Top 0.254: ARM.27 176.53,106.05 168.91,98.42 99.69,98.42 83.19,81.92 64.77,81.92 62.87,83.82 ENC3.6
ENC3_B
  Top 0.254: ENC9.6 62.87,160.02 64.77,158.12 68.58,158.12 69.85,156.84 69.85,132.72 87.63,114.94 87.63,110.49 90.81,107.31 99.06,107.31 101.6,109.86 DRIVE.27
ENC4_A
  Bottom 0.254: ENC10.7 61.59,149.86 71.12,140.34 71.12,136.53 87.63,120.02 101.6,120.02 104.14,117.47 DRIVE.28
ENC4_ARM_A
  Top 0.254: ARM.28 177.8,114.3 177.8,105.41 169.54,97.16 139.06,97.16 138.43,97.16 100.33,97.16 78.74,75.56 64.77,75.56 62.87,73.66 ENC4.7
ENC4_ARM_B
  Top 0.254: ARM.29 179.07,104.78 170.18,95.89 140.34,95.89 138.43,95.89 100.97,95.89 74.3,69.22 64.77,69.22 62.87,71.12 ENC4.6
ENC4_B
  Bottom 0.254: ENC10.6 62.23,147.32 69.85,139.7 69.85,135.89 87,118.75 100.97,118.75 102.87,116.84 102.87,114.3 DRIVE.29
ENC5_A
  Bottom 0.254: DRIVE.30 105.41,114.3 105.41,111.12 104.78,110.49 93.34,110.49 71.75,132.08 67.31,132.08 62.23,137.16 ENC11.7
ENC5_ARM_A
  Top 0.254: ARM.30 180.34,114.3 180.34,104.14 170.81,94.61 139.7,94.61 138.43,94.61 101.6,94.61 73.66,66.67 73.66,64.77 71.75,62.87 64.77,62.87 62.87,60.96 ENC5.7
ENC5_ARM_B
  Top 0.254: ARM.31 181.61,103.5 171.45,93.34 139.7,93.34 138.43,93.34 102.23,93.34 74.93,66.04 74.93,59.05 72.39,56.52 64.77,56.52 62.87,58.42 ENC5.6
ENC5_B
  Bottom 0.254: ENC11.6 62.87,134.62 66.67,130.81 71.12,130.81 92.71,109.22 105.41,109.22 106.68,110.49 DRIVE.31
ENC6_A
  Bottom 0.254: DRIVE.32 107.95,114.3 107.95,109.86 106.05,107.95 92.08,107.95 80.01,120.02 66.67,120.02 62.23,124.46 ENC12.7
ENC6_ARM_A
  Top 0.254: ARM.32 182.88,114.3 182.88,102.87 172.09,92.08 102.87,92.08 76.2,65.41 76.2,52.7 73.66,50.16 64.77,50.16 62.87,48.26 ENC6.7
ENC6_ARM_B
  Top 0.254: ARM.33 184.15,102.23 172.72,90.81 103.5,90.81 93.34,80.64 92.39,79.69 77.47,64.77 77.47,46.99 74.3,43.81 64.77,43.81 62.87,45.72 ENC6.6
ENC6_B
  Bottom 0.254: ENC12.6 62.87,121.92 66.04,118.75 79.38,118.75 91.44,106.68 106.68,106.68 109.22,109.22 109.22,111.12 109.22,111.76 DRIVE.33
GND
  pour $GND (isolate 0.381): 0,195.58 381,195.58 381,0 0,0
LIM_1
  Top 0.254: LIMIT_SWITCHES.6 6.88,35.81 16.64,35.81 19.05,38.23 26.54,38.23 R31.2 R25.1
LIM_2
  Top 0.254: LIMIT_SWITCHES.7 7.02,31.75 17.78,31.75 19.05,33.02 26.67,33.02 R32.2 R26.1
LIM_3
  Top 0.254: LIMIT_SWITCHES.8 7.03,27.56 18.67,27.56 19.05,27.94 26.67,27.94 R33.2 R27.1
LIM_4
  Top 0.254: LIMIT_SWITCHES.9 6.91,23.24 18.67,23.24 19.05,22.86 26.67,22.86 R34.2 R28.1
LIM_5
  Top 0.254: LIMIT_SWITCHES.10 6.92,19.05 17.78,19.05 19.05,17.78 26.67,17.78 R35.2 R29.1
LIMIT_1
  Top 0.254: LIMIT_4.7 62.87,35.56 64.77,37.47 74.93,37.47 78.74,41.27 78.74,63.5 78.74,64.14 104.14,89.53 104.78,89.53 107.95,89.53 173.35,89.53 185.42,101.6 185.42,109.22 ARM.37
LIMIT_2
  Top 0.254: ARM.38 190.5,114.3 190.5,112.39 186.69,108.58 186.69,100.97 173.99,88.27 104.78,88.27 80.01,63.5 80.01,35.56 75.56,31.11 64.77,31.11 62.87,33.02 LIMIT_4.6
LIMIT_3
  Top 0.254: LIMIT_5.7 62.87,22.86 64.77,24.77 74.93,24.77 81.28,31.11 81.28,62.87 105.41,87 174.62,87 187.96,100.33 187.96,107.95 191.77,111.76 ARM.39
LIMIT_4
  Top 0.254: ARM.40 193.04,114.3 193.04,111.12 189.23,107.31 189.23,99.69 175.26,85.72 106.05,85.72 82.55,62.23 82.55,30.48 70.48,18.41 64.77,18.41 62.87,20.32 LIMIT_5.6
LIMIT_5
  Top 0.254: LIMIT_6.7 64.14,10.16 83.82,29.84 83.82,61.59 106.68,84.45 175.9,84.45 190.5,99.06 190.5,106.68 194.31,110.49 ARM.41
N$1
  Bottom 1.27: ARM_PWM.12 ARM_PWM.11 ARM_PWM.10 ARM_PWM.9 ARM_PWM.8 ARM_PWM.7
N$2
  Top 0.254: R1.2 46.99,109.22 46.99,113.03 48.26,114.3 ENC1.1
N$3
  Top 0.254: R2.2 49.53,106.68 ENC1.4
N$4
  Top 0.254: R3.2 49.53,101.6 ENC2.1
N$5
  Top 0.254: R4.2 46.99,93.98 ENC2.4
N$6
  Top 0.254: R5.2 46.99,88.9 ENC3.1
N$7
  Top 0.254: R6.2 ENC3.4
N$8
  Bottom 1.27: DRIVE_PWM.12 DRIVE_PWM.11 DRIVE_PWM.10 DRIVE_PWM.9 DRIVE_PWM.8 DRIVE_PWM.7
N$9
  Top 0.254: R7.2 ENC4.1
N$10
  Top 0.254: R8.2 46.99,68.58 ENC4.4
N$11
  Top 0.254: R9.2 46.99,63.5 ENC5.1
N$12
  Top 0.254: R10.2 49.53,55.88 ENC5.4
N$13
  Top 0.254: R11.2 49.53,50.8 ENC6.1
N$14
  Top 0.254: R12.2 46.99,48.26 46.99,44.45 48.26,43.18 ENC6.4
N$15
  Top 0.254: R25.2 46.99,38.1 LIMIT_4.1
N$16
  Top 0.254: SCI_SENSORS.2 347.12,40.01 353.69,40.01 363.22,49.53 363.22,129.54 303.53,189.23 247.01,189.23 245.75,187.96 SCIENCE.SDA1
N$17
  Top 0.254: R26.2 LIMIT_4.4
N$18
  Top 0.254: SCIENCE.SCL1 304.17,190.5 364.49,130.18 364.49,48.9 354.33,38.73 344.19,38.73 SCI_SENSORS.1
N$19
  Top 0.254: R27.2 LIMIT_5.1
N$21
  Top 0.254: R28.2 46.99,17.78 LIMIT_5.4
N$23
  Top 0.254: R29.2 46.99,12.7 LIMIT_6.1
N$27
  Top 0.254: ENC7.1 48.26,190.5 46.99,189.23 46.99,185.42 R13.2
N$28
  Top 0.254: R14.2 49.53,182.88 ENC7.4
N$29
  Top 0.254: R15.2 49.53,177.8 ENC8.1
N$30
  Top 0.254: R16.2 46.99,170.18 ENC8.4
N$31
  Top 0.254: R17.2 46.99,165.1 ENC9.1
N$32
  Top 0.254: R18.2 ENC9.4
N$33
  Top 0.254: R19.2 ENC10.1
N$34
  Top 0.254: R20.2 46.99,144.78 ENC10.4
N$35
  Top 0.254: R21.2 46.99,139.7 ENC11.1
N$36
  Top 0.254: R22.2 49.53,132.08 ENC11.4
N$37
  Top 0.254: R23.2 49.53,127 ENC12.1
N$38
  Top 0.254: R24.2 46.99,124.46 46.99,120.65 48.26,119.38 ENC12.4
PWM_ARM_J1
  Top 0.254: ARM.2 166.37,151.13 160.27,145.03 155.41,145.03 ARM_PWM.1
PWM_ARM_J2
  Top 0.254: ARM.3 165.74,153.67 163,150.94 161.29,149.22 161.16,149.1 155.54,149.1 ARM_PWM.2
PWM_ARM_J3
  Top 0.254: ARM.4 165.1,156.21 162.18,153.29 155.55,153.29 ARM_PWM.3
PWM_ARM_J4
  Top 0.254: ARM_PWM.4 155.56,157.48 163.83,157.48 165.1,158.75 ARM.5
PWM_ARM_J5
  Top 0.254: ARM_PWM.5 155.57,161.67 164.08,161.67 164.47,161.29 ARM.6
PWM_ARM_J6
  Top 0.254: ARM_PWM.6 155.58,165.86 163.7,165.86 165.74,163.83 ARM.7
PWM_DRIVE_1
  Top 0.254: DRIVE.2 91.44,151.13 85.23,144.92 82.47,144.92 82.46,144.91 80.6,144.91 DRIVE_PWM.1
PWM_DRIVE_2
  Top 0.254: DRIVE.3 90.81,153.67 87.69,150.56 86.36,149.22 86.23,149.1 80.61,149.1 80.48,149.22 80.41,149.3 DRIVE_PWM.2
PWM_DRIVE_3
  Top 0.254: 94.61,156.21 DRIVE.4 90.17,156.21 87.27,153.31 80.6,153.31 DRIVE_PWM.3
PWM_DRIVE_4
  Top 0.254: DRIVE.5 90.17,158.75 88.9,157.48 80.63,157.48 DRIVE_PWM.4
PWM_DRIVE_5
  Top 0.254: DRIVE_PWM.5 80.67,161.64 89.19,161.64 89.53,161.29 DRIVE.6
PWM_DRIVE_6
  Top 0.254: DRIVE_PWM.6 80.55,165.96 88.68,165.96 90.81,163.83 DRIVE.7
RESET  (via drill 0.38)
  Top 0.254: S4.1 373.1,53.98 373.38,54.25 R59.1 | DRIVE.RESET 162.56,176.53 165.1,173.99 165.1,167.64 167,165.74 212.09,165.74 214,167.64 214,175.26 215.26,176.53 ARM.RESET 219.07,176.53 220.34,175.26 220.34,167.64 222.25,165.74 287.65,165.74 288.93,167 288.93,175.26 290.19,176.53 SCIENCE.RESET 294,176.53 295.27,175.26 295.27,144.78 299.72,140.34 323.85,140.34 v335.28,128.91
  Bottom 0.254: v335.28,128.91 335.24,128.86 335.24,118.75 | 335.24,118.75 TX2HEADER.15 | 335.24,118.75 336.55,117.43 336.55,114.3 337.82,113.03 373.38,113.03 378.46,107.95 378.46,60.96 R59.1
SCI_ADD_1
  Top 0.254: SCIENCE.42 270.51,114.3 270.51,108.58 267.97,106.05 267.97,99.06 R68.1 269.24,92.71 SCI_ADD.8
SCI_ADD_2
  Top 0.254: SCIENCE.43 271.78,97.79 R69.1 271.78,95.25 SCI_ADD.7
SCI_ADD_3
  Top 0.254: SCIENCE.44 273.05,114.3 273.05,99.06 R70.1 274.32,95.25 SCI_ADD.6
SCI_ADD_4
  Top 0.254: SCIENCE.45 274.32,100.33 276.23,98.42 278.76,98.42 R71.1 276.86,92.71 SCI_ADD.5
SCL
  Top 0.254: DRIVE.SCL 96.52,123.19 97.79,124.46 125.09,124.46 138.43,137.79 161.29,137.79 164.47,134.62 164.47,125.09 166.37,123.19 ARM.SCL 171.45,123.19 172.72,124.46 199.39,124.46 212.72,137.79 226.69,137.79 241.3,123.19 SCIENCE.SCL 246.38,123.19 260.99,137.79 322.58,137.79 340.32,120.06 TX2HEADER.11 339.09,117.45 339.09,113.67 333.38,107.95 333.38,46.35 327.87,40.85 IMU1.2 324.68,45.91 326.39,47.62 326.39,56.92 IMU2.2
SDA
  Top 0.254: DRIVE.SDA 124.46,125.73 137.79,139.06 161.93,139.06 165.74,135.25 165.74,126.36 166.37,125.73 ARM.SDA 198.75,125.73 212.09,139.06 227.33,139.06 240.66,125.73 SCIENCE.SDA 247.01,125.73 260.35,139.06 323.21,139.06 341.63,120.65 341.63,117.45 TX2HEADER.12 340.32,112.99 334.64,107.31 334.64,45.72 327.66,38.73 322.6,38.73 IMU1.1 320.48,45.52 322.58,47.62 322.58,56.53 IMU2.1
STEPPER_DIR
  Top 0.254: ARM_STEPPER.2 155.37,122.56 161.93,122.56 165.1,119.38 184.78,119.38 187.96,116.2 187.96,114.3 ARM.35
STEPPER_ENA
  Top 0.254: ARM_STEPPER.1 155.52,118.2 184.06,118.2 ARM.34
STEPPER_PUL
  Top 0.254: ARM_STEPPER.3 155.75,126.36 160.66,126.36 166.37,120.65 185.42,120.65 189.23,116.84 ARM.36
UART0_RX
  Top 0.254: GPS.1 344.29,60.84 346.6,60.84 351.79,66.04 351.79,113.03 350.48,114.34 TX2HEADER.4
UART0_TX
  Top 0.254: TX2HEADER.3 351.79,117.37 351.79,114.94 353.06,113.67 353.06,65.42 GPS.2
VCC  (via drill 0.38)
  Top 0.254: v238.76,83.19 238.71,83.13 DRIVE_ADD.4 DRIVE_ADD.3 DRIVE_ADD.2 DRIVE_ADD.1 | v259.08,83.19 259.03,83.13 ARM_ADD.4 ARM_ADD.3 ARM_ADD.2 ARM_ADD.1 | SCI_ADD.4 SCI_ADD.2 SCI_ADD.1 | SCI_ADD.4 279.35,83.13 v279.4,83.19 | SCI_ADD.3 SCI_ADD.4
  Bottom 1.27: VIN.2 361.12,85.92 356.87,90.17 C4.2 352.43,99.06 351.15,100.33 C5.+
  pour $VCC (isolate 0.381): 0,195.58 0,0 381,0 381,195.58
VDD
  Top 0.508: 342.07,53.15 GPS.3
  Top 0.635: TX2HEADER.1 354.96,116.73 354.96,114.3 354.33,113.67 354.33,62.87 347.35,55.88 344.81,55.88 342.07,53.15 | GPS.3 339.09,50.15 339.09,38.33 SCI_SENSORS.3 339.11,32.38 323.44,32.38 IMU1.3 317.5,38.33 317.5,45.09 320.48,48.06 IMU2.3

## Text on the board
Dimension: FABRICATION NOTES (UNLESS OTHERWISE SPECIFIED): / / 1. Material: FR4 or equivalent / 2. 4 layers, 1 oz copper all layers / 3. Overall thickness: 0.093" +/- 10% / 4. Finish: HASL, Soldermask: GREEN, Silkscreen: WHITE
tPlace: Ryerson Rams Robotics / R3-URC18-4-002-004 | RESET
tNames: TX2 | 12V 5V | SDA SCL / VDD GND | Rx Tx / VDD GND